# Altium PCB LedBtn.PcbDoc
Units mm, origin at the board's own origin, x right, y up, seen from the top; angles counter-clockwise.
Board outline 74 x 89.7 mm, 2 copper layers (Top Layer, Bottom Layer), stack 1.036 mm thick; 72 components, 49 nets, 224 pads, 24 vias.
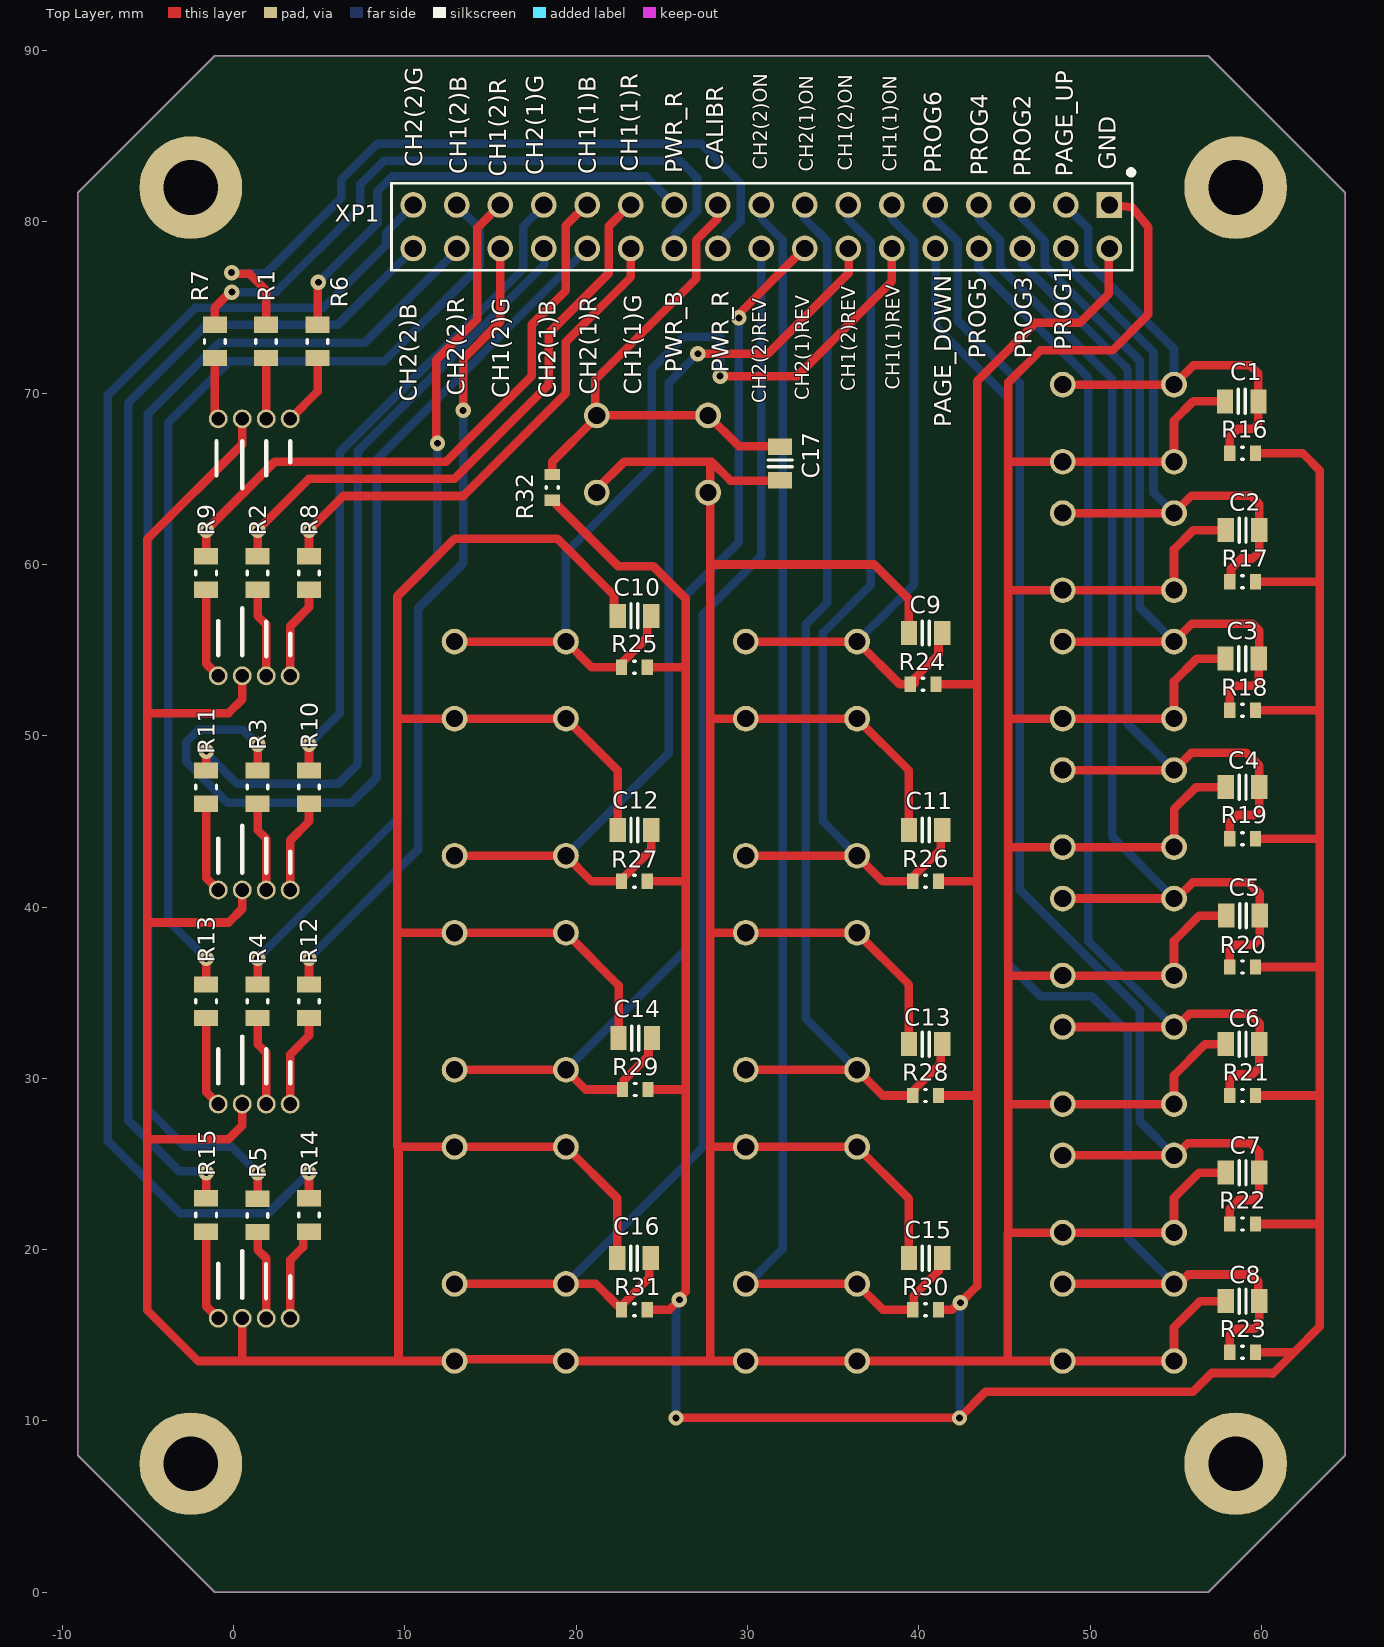
[diagram p0: Top Layer view]
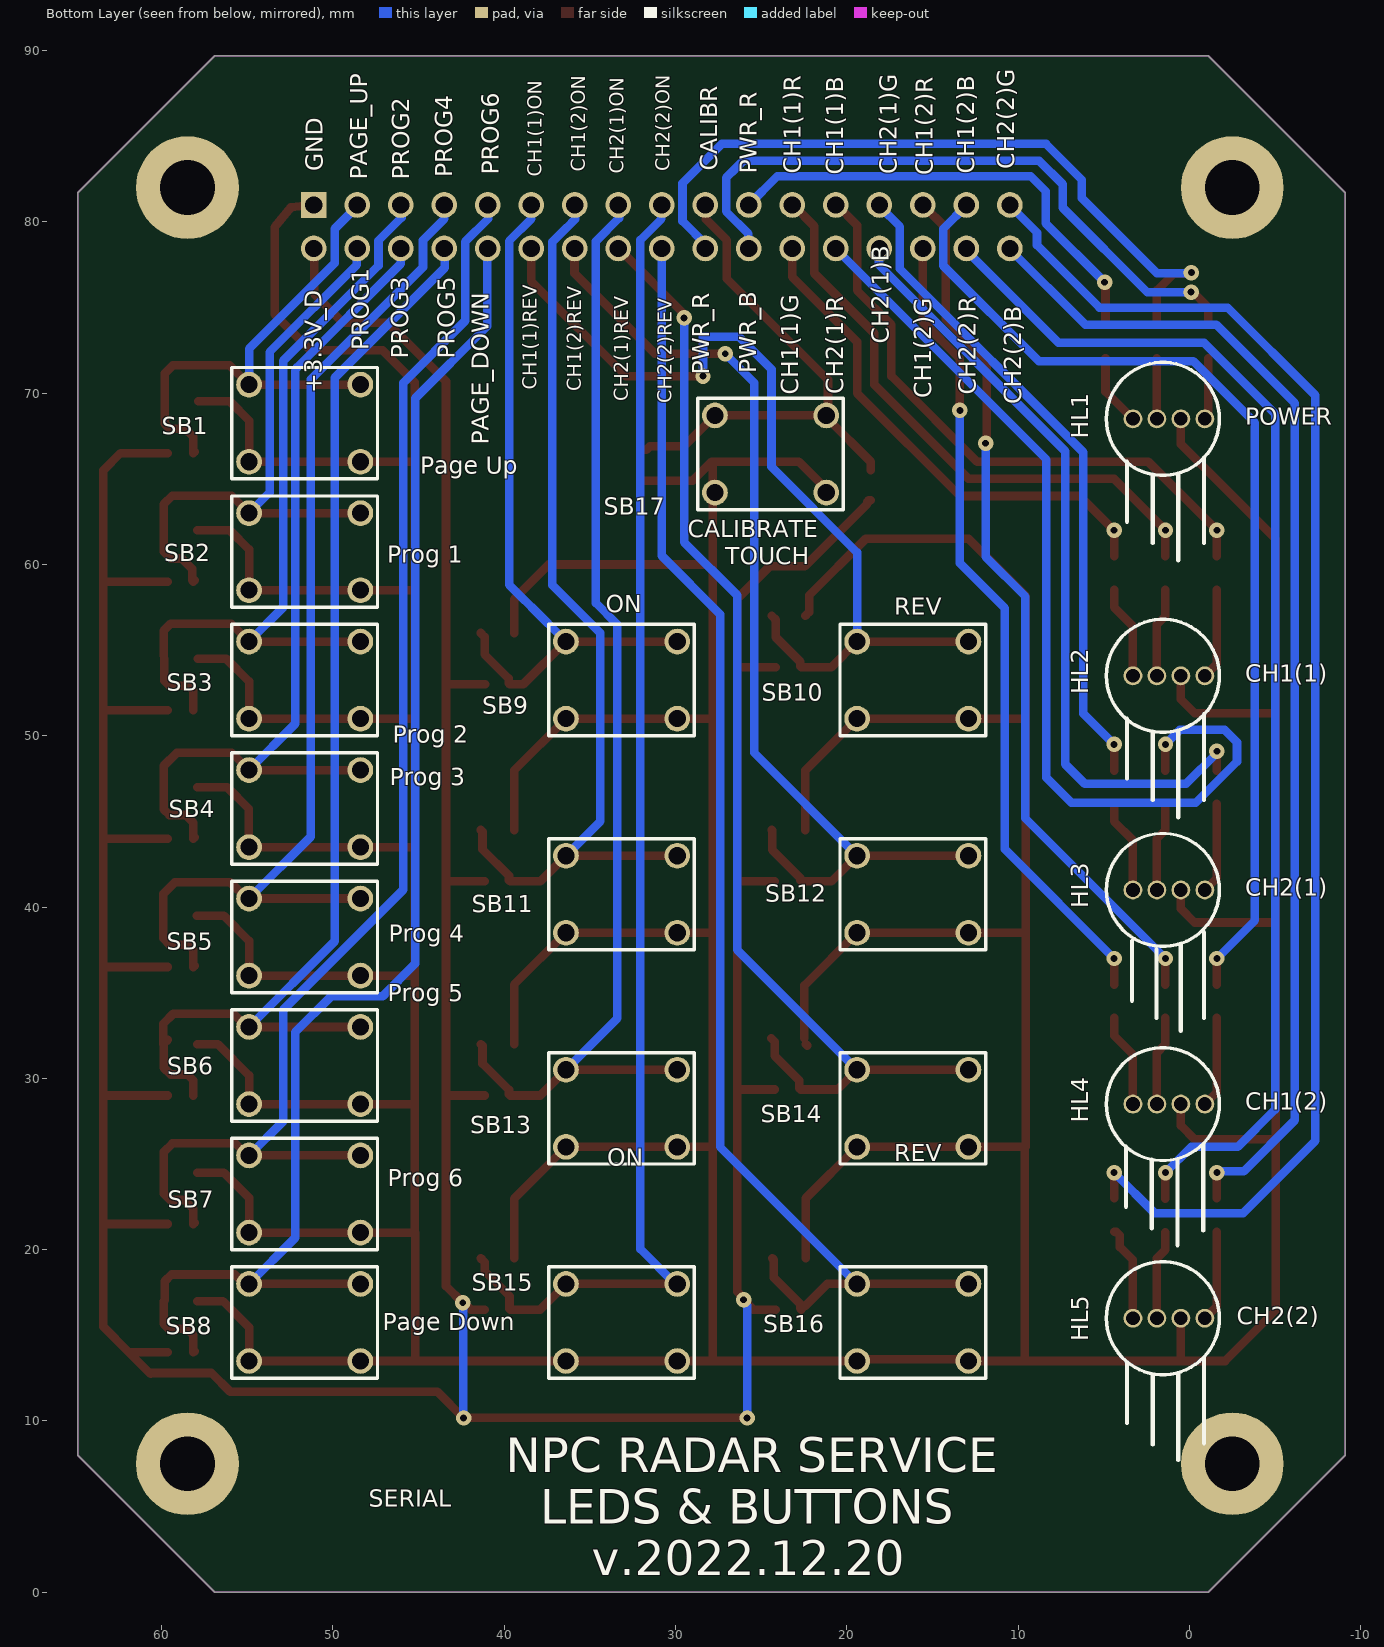
[diagram p1: Bottom Layer view, seen from below]

## Layer stack, top to bottom
Top Solder: solder mask 0.0102, Solder Resist, Dk 3.5
Top Layer: signal copper 0.018
Dielectric 1: dielectric 1, FR-4, Dk 4.8
Bottom Layer: signal copper 0.018
Bottom Solder: solder mask 0.0102, Solder Resist, Dk 3.5

## Board outline
-9.1,8 -9.1,81.7 -1.1,89.7 56.9,89.7 64.9,81.7 64.9,8 56.9,0 -1.1,0

## Design rules (kind name [scope] priority, off if disabled: settings)
Clearance [All] p1: gap=0.2 ignorepadtopadclearanceinfootprint=FALSE except(0: Arc-Hole Track-Hole SMDPad-Hole THPad-Hole Via-Hole Fill-Hole Poly-Hole Region-Hole Text-Hole)
PlaneConnect [All] p1: planeconnectstyle=Direct reliefexpansion=0.508 reliefentries=4 reliefconductorwidth=0.254 reliefairgap=0.254
PolygonConnect [All] p1: connectstyle=Direct reliefconductorwidth=0.254 reliefentries=4 polygonreliefangle="90 Angle" airgapwidth=0.254
RoutingVias [All] p1: holewidth=0.4 width=0.9 viastyle="Through Hole" minholewidth=0.4 minwidth=0.9 maxholewidth=2 maxwidth=4
SolderMaskExpansion [All] p1: expansion=0.05 istentingtop=FALSE
Width Width_1 [All] p1: maxlimit=3 minlimit=0.2 preferedwidth=0.5
29 further rules are at their usual default settings.

## Components (designator, comment, footprint, x,y, rotation, side; value= is the part's Value field where it differs from the comment)
C1 "Capacitor" Cap0805 58.85,69.525 r90 top value=0,1мкФ
C2 "Capacitor" Cap0805 58.9,62 r90 top value=0,1мкФ
C3 "Capacitor" Cap0805 58.875,54.5 r90 top value=0,1мкФ
C4 "Capacitor" Cap0805 58.9,47 r90 top value=0,1мкФ
C5 "Capacitor" Cap0805 58.925,39.5 r90 top value=0,1мкФ
C6 "Capacitor" Cap0805 58.9,32 r90 top value=0,1мкФ
C7 "Capacitor" Cap0805 58.9,24.5 r90 top value=0,1мкФ
C8 "Capacitor" Cap0805 58.9,17 r90 top value=0,1мкФ
C9 "Capacitor" Cap0805 40.4,56 r90 top value=0,1мкФ
C10 "Capacitor" Cap0805 23.4,57 r90 top value=0,1мкФ
C11 "Capacitor" Cap0805 40.4,44.5 r90 top value=0,1мкФ
C12 "Capacitor" Cap0805 23.4,44.5 r90 top value=0,1мкФ
C13 "Capacitor" Cap0805 40.4,32 r90 top value=0,1мкФ
C14 "Capacitor" Cap0805 23.45,32.35 r90 top value=0,1мкФ
C15 "Capacitor" Cap0805 40.4,19.5 r90 top value=0,1мкФ
C16 "Capacitor" Cap0805 23.375,19.5 r90 top value=0,1мкФ
C17 "Capacitor" Cap0805 31.9,65.9 r180 top value=0,1мкФ
HL1 "LED-RGB_C" BL-L515 3.3,68.5 r180 bottom
HL2 "LED-RGB_C" BL-L515 3.3,53.5 r180 bottom
HL3 "LED-RGB_C" BL-L515 3.3,41 r180 bottom
HL4 "LED-RGB_C" BL-L515 3.3,28.5 r180 bottom
HL5 "LED-RGB_C" BL-L515 3.3,16 r180 bottom
R1 "Resistor0125" Res0805 1.9,73.025 r180 top value=1к
R2 "Resistor0125" Res0805 1.4,59.5 r180 top value=1к
R3 "Resistor0125" Res0805 1.4,47 r180 top value=1к
R4 "Resistor0125" Res0805 1.4,34.5 r180 top value=1к
R5 "Resistor0125" Res0805 1.4,22 r180 top value=1к
R6 "Resistor0125" Res0805 4.9,73.025 r180 top value=1к
R7 "Resistor0125" Res0805 -1.1,73.025 r180 top value=1к
R8 "Resistor0125" Res0805 4.4,59.5 r180 top value=1к
R9 "Resistor0125" Res0805 -1.6,59.5 r180 top value=1к
R10 "Resistor0125" Res0805 4.4,47 r180 top value=1к
R11 "Resistor0125" Res0805 -1.6,47 r180 top value=1к
R12 "Resistor0125" Res0805 4.4,34.5 r180 top value=1к
R13 "Resistor0125" Res0805 -1.6,34.5 r180 top value=1к
R14 "Resistor0125" Res0805 4.4,22.025 r180 top value=1к
R15 "Resistor0125" Res0805 -1.6,22.025 r180 top value=1к
R16 "Resistor01" Res0603 58.9,66.5 r90 top value=10к
R17 "Resistor01" Res0603 58.9,59 r90 top value=10к
R18 "Resistor01" Res0603 58.9,51.5 r90 top value=10к
R19 "Resistor01" Res0603 58.9,44 r90 top value=10к
R20 "Resistor01" Res0603 58.9,36.5 r90 top value=10к
R21 "Resistor01" Res0603 58.9,29 r90 top value=10к
R22 "Resistor01" Res0603 58.9,21.5 r90 top value=10к
R23 "Resistor01" Res0603 58.9,14 r90 top value=10к
R24 "Resistor01" Res0603 40.25,53 r90 top value=10к
R25 "Resistor01" Res0603 23.4,54 r90 top value=10к
R26 "Resistor01" Res0603 40.4,41.5 r90 top value=10к
R27 "Resistor01" Res0603 23.4,41.5 r90 top value=10к
R28 "Resistor01" Res0603 40.4,29 r90 top value=10к
R29 "Resistor01" Res0603 23.45,29.35 r90 top value=10к
R30 "Resistor01" Res0603 40.4,16.5 r90 top value=10к
R31 "Resistor01" Res0603 23.4,16.5 r90 top value=10к
R32 "Resistor01" Res0603 18.6,64.5 r0 top value=10к
SB1 "Knopka" Switch_tact_11mm 54.9,66 r180 bottom
SB2 "Knopka" Switch_tact_11mm 54.9,58.5 r180 bottom
SB3 "Knopka" Switch_tact_11mm 54.9,51 r180 bottom
SB4 "Knopka" Switch_tact_11mm 54.9,43.5 r180 bottom
SB5 "Knopka" Switch_tact_11mm 54.9,36 r180 bottom
SB6 "Knopka" Switch_tact_11mm 54.9,28.5 r180 bottom
SB7 "Knopka" Switch_tact_11mm 54.9,21 r180 bottom
SB8 "Knopka" Switch_tact_11mm 54.9,13.5 r180 bottom
SB9 "Knopka" Switch_tact_11mm 36.4,51 r180 bottom
SB10 "Knopka" Switch_tact_11mm 19.4,51 r180 bottom
SB11 "Knopka" Switch_tact_11mm 36.4,38.5 r180 bottom
SB12 "Knopka" Switch_tact_11mm 19.4,38.5 r180 bottom
SB13 "Knopka" Switch_tact_11mm 36.4,26 r180 bottom
SB14 "Knopka" Switch_tact_11mm 19.4,26 r180 bottom
SB15 "Knopka" Switch_tact_11mm 36.4,13.5 r180 bottom
SB16 "Knopka" Switch_tact_11mm 19.4,13.5 r180 bottom
SB17 "Knopka" Switch_tact_11mm 27.7,64.2 r180 bottom
XP1 "ConnectorP34" PLD-34 30.805,79.72 r270 top value=34

## Footprints (in the part's own frame and the unit in brackets; to place one, negate y for a bottom-side part, rotate by r counter-clockwise, add the part's x,y. Pads: shape width x height; smd on the part's side, far side on the other; paste and mask are expansions set on the pad)
BL-L515 [mm]
  round 1.1 hole 0.8: 1(0,0) 2(1.4,0) 3(2.8,0) 4(4.2,0)
  silkscreen extent -1.55,-3.3 5.05,3.3, body extent -1.27,-2.95 4.63,2.95, height 9.1
Cap0805 [mm] "Chip Capacitor, 2-Leads, Body 2,00x1,25mm, IPC Medium Density"
  rect 1.4x0.95 smd: 1(0,0.975) 2(0,-0.975)
  silkscreen extent -0.7,-0.2 0.7,0.2, body extent -0.62,-1 0.63,1, height 0.58
PLD-34 [mm]
  rect 1.5x1.5 hole 1 mask+0: 1(-1.27,20.32)
  round 1.5 hole 1 mask+0: 2(1.27,20.32) 3(-1.27,17.78) 4(1.27,17.78) 5(-1.27,15.24) 6(1.27,15.24) 7(-1.27,12.7) 8(1.27,12.7) 9(-1.27,10.16) 10(1.27,10.16) 11(-1.27,7.62) 12(1.27,7.62) 13(-1.27,5.08) 14(1.27,5.08) 15(-1.27,2.54) 16(1.27,2.54) 17(-1.27,0) 18(1.27,0) 19(-1.27,-2.54) 20(1.27,-2.54) 21(-1.27,-5.08) 22(1.27,-5.08) 23(-1.27,-7.62) 24(1.27,-7.62) 25(-1.27,-10.16) 26(1.27,-10.16) 27(-1.27,-12.7) 28(1.27,-12.7) 29(-1.27,-15.24) 30(1.27,-15.24) 31(-1.27,-17.78) 32(1.27,-17.78) 33(-1.27,-20.32) 34(1.27,-20.32)
  silkscreen extent -3.32,-21.59 2.54,21.74, body extent -2.5,-21.59 2.5,21.59, height 8.5
Res0603 [mm] "Chip Resistor, 2-Leads, Body 1,60x0,80mm, IPC Medium Density"
  rect 0.9x0.65 smd: 1(0,0.75) 2(0,-0.75)
  silkscreen extent -0.35,-0.05 0.35,0.05, body extent -0.4,-0.8 0.4,0.8, height 0.5
Res0805 [mm] "Chip Resistor, 2-Leads, Body 2,00x1,25mm, IPC Medium Density"
  rect 1.4x0.95 smd: 1(0,0.975) 2(0,-0.975)
  silkscreen extent -0.6,-0.1 0.6,0.1, body extent -0.63,-1 0.63,1, height 0.43
Switch_tact_11mm [mm]
  round 1.5 hole 1: 1(0,4.5) 2(6.5,4.5) 3(0,0) 4(6.5,0)
  silkscreen extent -1,-1 7.5,5.5, body extent -0.65,-0.8 7.25,5.2, height 11.1

## Part data
C1 C2 C3 C4 C5 C6 C7 C8 C9 C10 C11 C12 C13 C14 C15 C16 C17: library part 2161, Manufacturer="ОАО «ВЗРД Монолит»", ManufacturerTU=ФЦТА.673516.016ТУ, Package="0805 (2012)", PartNumber="К10-84в-2012М-50 В-Н90-0,1 мкФ+80 %-20 %-N-A", SolderTemperature=175, TemperatureRange="от минус 60 до 85", VoltageLimit=50, Alternative="0805 0,1 мкФ, 50 В, ±10 %", CardKRR=67, ComponentLink1Description=К10-84, ComponentLink1URL=\\192.168.0.101\U_Base\PDF\C\K10-84.pdf, DataSheet=#\\192.168.0.101\U_Base\PDF\C\K10-84.pdf#, Group=Конденсаторы, HelpURL=\\192.168.0.101\U_Base\PDF\C\K10-84.pdf, Key=2161, MilitaryControl=ВП, Modify=13.03.2019, MountType=ПМ, Name=К10-84в, SolderName=K10-84v-2012M-50V-N90-0,1mkF, ViewControl="В, 10%", X_SORT_1=100, X_SORT_2=200, X_SORT_3=1
HL1 HL2 HL3 HL4 HL5: library part 90, "Светодиод RGB с общим анодом BL-L515RGBW-CA", Manufacturer="Betlux Electronics", Package=6mm, PartNumber="Светодиод BL-L515RGBW-CС", ComponentLink1Description=BL-L515, ComponentLink1URL="\\192.168.0.101\U_Base\PDF\V\BetLux Electronics.pdf", DataSheet="#\\192.168.0.101\U_Base\PDF\V\BetLux Electronics.pdf#", Group=Светодиоды, HelpURL="\\192.168.0.101\U_Base\PDF\V\BetLux Electronics.pdf", Key=90, MilitaryControl=ОТК, Modify=14.03.2019, MountType=РМ, Name=BL-L515, Notice="Betlux Electronics", SolderName=BL-L515, ViewControl="В, 10%", X_SORT_1=500, X_SORT_2=301, X_SORT_3=1
R1 R2 R3 R4 R5 R6 R7 R8 R9 R10 R11 R12 R13 R14 R15: library part 2957, Manufacturer="АО «НПО «Эркон»", ManufacturerTU=ОЖ0.467.164ТУ, Package="0805 (2012)", PartNumber="Р1-8В-0,125-1 кОм±5 %-Т-А", PowerLimit=0,125, SolderTemperature=255, TemperatureRange="от минус 65 до 155", VoltageLimit=150, Alternative="0805 1 кОм, 0,125 Вт, ±5 %", Alternative2="Р1-8В-0,125-1 кОм±5 %-Т-А ОЖ0.467.164ТУ", CardKRR=68, ComponentLink1Description=Р1-8В, ComponentLink1URL=\\192.168.0.101\U_Base\PDF\R\Р1-8В.pdf, DataSheet=#\\192.168.0.101\U_Base\PDF\R\Р1-8В.pdf#, Group=Резисторы, HelpURL=\\192.168.0.101\U_Base\PDF\R\Р1-8В.pdf, Key=2957, Mark=102, Mass=0,006, MilitaryControl=ВП, Modify=28.06.2019, MountType=ПМ, Name=Р1-8В, SolderName=R1-8B-0.125-1kOm, ViewControl="В, 10%", X_SORT_1=400, X_SORT_2=100, X_SORT_3=1
R16 R17 R18 R19 R20 R21 R22 R23 R24 R25 R26 R27 R28 R29 R30 R31 R32: library part 2943, Manufacturer="АО «НПО «Эркон»", ManufacturerTU=ОЖ0.467.164ТУ, Package="0603 (1608)", PartNumber="Р1-8В-0,1-10 кОм±5 %-Т-А", PowerLimit=0,1, SolderTemperature=255, TemperatureRange="от минус 65 до 155", VoltageLimit=100, Alternative="0603 10 кОм, 0,1 Вт, ±5 %", Alternative2="Р1-8В-0,1-10 кОм±5 %-Т-А ОЖ0.467.164ТУ", CardKRR=68, ComponentLink1Description=Р1-8В, ComponentLink1URL=\\192.168.0.101\U_Base\PDF\R\Р1-8В.pdf, DataSheet=#\\192.168.0.101\U_Base\PDF\R\Р1-8В.pdf#, Group=Резисторы, HelpURL=\\192.168.0.101\U_Base\PDF\R\Р1-8В.pdf, Key=2943, Mark=103, Mass=0,002, MilitaryControl=ВП, Modify=28.06.2019, MountType=ПМ, Name=Р1-8В, SolderName=R1-8B-0.1-10kOm, ViewControl="В, 10%", X_SORT_1=400, X_SORT_2=100, X_SORT_3=1
SB1 SB2 SB3 SB4 SB5 SB6 SB7 SB8 SB9 SB10 SB11 SB12 SB13 SB14 SB15 SB16 SB17: library part 60, Manufacturer="KLS Electronic", PartNumber="Кнопка тактовая прямая KLS7-TS6601-11-180", Alternative=IT-1102, ComponentLink1URL=\\192.168.0.101\U_Base\PDF\OTHER\KLS7-TS6601.pdf, DataSheet=#\\192.168.0.101\U_Base\PDF\OTHER\KLS7-TS6601.pdf#, Group="Кнопка тактовая", HelpURL=\\192.168.0.101\U_Base\PDF\OTHER\KLS7-TS6601.pdf, Key=60, MilitaryControl=ОТК, Modify=05.12.2022, MountType=РМ, Name=KLS7-TS6601-11-180, SolderName=KLS7-TS6601-11-180, ViewControl=В,100%
XP1: library part 57, CurrentLimit=1, Manufacturer="АО «Карачевский завод Электродеталь»", ManufacturerTU=РЮМК.430420.011ТУ, Package=PLD, PartNumber="Вилка СНП346-34ВП22-2-В", PowerLimit=250, TemperatureRange="от минус 60 до 85", Alternative=PLD-34, Alternative2="СНП346-34ВП22-2 РЮМК.430420.019ТУ", CardKRR=75, ComponentLink1Description=СНП346, ComponentLink1URL=\\192.168.0.101\U_Base\PDF\X\СНП346.pdf, Conn01Name=GND, Conn02Name=3.3V_D, Conn03Name=PAGE_UP, Conn04Name=PROG1, Conn05Name=PROG2, Conn06Name=PROG3, Conn07Name=PROG4, Conn08Name=PROG5, Conn09Name=PROG6, Conn10Name=PAGE_DOWN, Conn11Name=CH1(1)_ON, Conn12Name=CH1(1)_REV, Conn13Name=CH1(2)_ON, Conn14Name=CH1(2)_REV, Conn15Name=CH2(1)_ON, Conn16Name=CH2(1)_REV, Conn17Name=CH2(2)_ON, Conn18Name=CH2(2)_REV, Conn19Name=CALIBR_TP, Conn20Name=LED_PWR_R, Conn21Name=LED_PWR_G, Conn22Name=LED_PWR_B, Conn23Name=LED_CH1(1)_R, Conn24Name=LED_CH1(1)_G, Conn25Name=LED_CH1(1)_B, Conn26Name=LED_CH2(1)_R, Conn27Name=LED_CH2(1)_G, Conn28Name=LED_CH2(1)_B, Conn29Name=LED_CH1(2)_R, Conn30Name=LED_CH1(2)_G, Conn31Name=LED_CH1(2)_B, Conn32Name=LED_CH2(2)_R, Conn33Name=LED_CH2(2)_G, Conn34Name=LED_CH2(2)_B, Conn35Name=35, Conn36Name=36, Conn37Name=37, Conn38Name=38, Conn39Name=39, Conn40Name=40, DataSheet=#\\192.168.0.101\U_Base\PDF\X\СНП346.pdf#, Group=Соединители, HelpURL=\\192.168.0.101\U_Base\PDF\X\СНП346.pdf, Key=57, Mass=0,00204, MilitaryControl=ВП, Modify=19.09.2018, MountType=РМ, Name=СНП346-34ВП22-2-В, SolderName=SNP346-34VP22-2, ViewControl="В, 10%", VoltageLimit=250, X_SORT_1=700, X_SORT_2=600, X_SORT_3=1

## Free pads (board coordinates)
  round 6 hole 3.2 unplated: 0(-2.5,7.5) 0(-2.5,82) 0(58.5,7.5) 0(58.5,82)

## Via types
v1: diameter 0.9, hole 0.4, Top Layer to Bottom Layer, tented both sides, 24 vias

## Nets (pads, with @x,y where several pads share a name; then routed paths per layer and width w, separated by ;. In a path a pad name is that pad's centre, name@x,y a point inside that pad or via, vN(x,y) a via of type N, cw(c..) or ccw(c..) an arc to the next point about the centre after c; other vN are vias at no path point)
+3.3V_D: R16.2 R17.2 R18.2 R19.2 R20.2 R21.2 R22.2 R23.2 R24.2 R25.2 R26.2 R27.2 R28.2 R29.2 R30.2 R31.2 R32.2 XP1.2 | length 267.9
  Top Layer w0.5: R32.2 18.725,63.75 18.8,63.675 18.8,63.55 22.45,59.9 24.5,59.9 26.4,58 26.4,54 ; R31.2 25.45,16.5 v1(26.025,17.075) 26.025,17.183 26.4,17.558 26.4,29.35 ; R25.2 26.4,54 ; R29.2 26.4,29.35 ; R27.2@24.225,41.5 26.4,41.5 ; v1(25.825,10.175) v1(42.375,10.175) 43.9,11.7 56,11.7 57.1,12.8 60.6,12.8 60.65,12.75 61.9,14 ; R24.2@41.1,53 43.4,53 ; R30.2 41.947,16.5 42.347,16.9 v1(42.425,16.9) 43.4,17.875 43.4,22.5 43.4,29 ; R28.2 43.4,29 ; R26.2 43.4,41.5 ; XP1.2@50.875,78.575 XP1.2@51.1,78.35 ; XP1.2@51.1,78.5 XP1.2@51.1,78.35 ; XP1.2@51.13,78.32 XP1.2@51.1,78.35 ; R23.2 61.9,14 ; R22.2 63.4,21.5 ; R21.2 63.4,29 ; R20.2 63.4,36.5 ; R19.2 63.4,44 ; R18.2 63.4,51.5 ; R17.2 63.4,59 ; R16.2 62.4,66.5 63.4,65.5 63.4,59 ; 26.4,29.35 26.4,41.5 ; 26.4,41.5 26.4,54 ; 43.4,29 43.4,41.5 ; 43.4,41.5 43.4,53 ; 43.4,53 43.4,70.7 46.8,74.1 49.4,74.1 51.1,75.8 XP1.2@51.1,78.35 ; 61.9,14 63.4,15.5 63.4,21.5 ; 63.4,21.5 63.4,29 ; 63.4,29 63.4,36.5 ; 63.4,36.5 63.4,44 ; 63.4,44 63.4,51.5 ; 63.4,51.5 63.4,59
  Bottom Layer w0.5: v1(25.825,10.175) 25.825,16.767 26.025,16.967 v1(26.025,17.075) ; v1(42.375,10.175) 42.4,10.2 42.4,16.825 42.375,16.85 v1(42.425,16.9)
BTN_CALIBR_TP: C17.2 R32.1 SB17.1 SB17.2 XP1.19 | length 31.4
  Top Layer w0.5: R32.1@18.6,65.5 18.6,66 SB17.2@21.1,68.5 ; XP1.19@28.238,81.038 28.238,80.163 27,78.925 27,76.675 21.1,70.775 SB17.2@21.1,68.5 ; C17.2@31.9,66.7 31.7,66.7 31.5,66.9 29.5,66.9 SB17.1 21.4,68.7 21.4,68.8 SB17.2@21.1,68.5
BTN_CH1(1)_ON: C9.2 R24.1 SB9.1 SB9.2 XP1.11 | length 42.5
  Top Layer w0.5: SB9.2 SB9.1 38.893,53.007 39.668,53.007 39.675,53 39.75,53.075 39.75,53.35 41.15,54.75 41.15,55.775 C9.2
  Bottom Layer w0.5: SB9.1 38.43,57.53 ; 37.8,56.9 39.72,58.82 39.72,78.88 38.425,80.175 XP1.11@38.425,80.706
BTN_CH1(1)_REV: C10.2 R25.1 SB10.1 SB10.2 XP1.12 | length 53.3
  Top Layer w0.5: SB10.2 SB10.1 20.9,54 R25.1 22.725,54.075 22.725,54.325 24.15,55.75 24.15,56.775 C10.2 ; v1(28.4,71) 32.9,71 38.425,76.525 XP1.12@38.425,78.4
  Bottom Layer w0.5: SB10.1 19.4,60.703 24.4,65.703 24.4,71.4 26.3,73.3 28.4,73.3 v1(28.4,71)
BTN_CH1(2)_ON: C11.2 R26.1 SB11.1 SB11.2 XP1.13 | length 54.6
  Top Layer w0.5: SB11.2 SB11.1 37.9,41.5 R26.1 39.725,41.575 39.725,41.825 41.27,43.37 41.27,44.395 C11.2
  Bottom Layer w0.5: XP1.13@35.86,80.965 35.86,80.165 36.375,79.65 36.382,79.65 37.085,78.947 37.085,78.94 37.2,78.825 37.2,58.8 34.4,56 34.4,45 SB11.1
BTN_CH1(2)_REV: C12.2 R27.1 SB12.1 SB12.2 XP1.14 | length 58.7
  Top Layer w0.5: SB12.2 SB12.1 20.9,41.5 R27.1 22.725,41.575 22.725,41.7 24.368,43.343 24.368,44.493 C12.2 ; v1(27.1,72.3) 31.2,72.3 35.9,77 XP1.14@35.9,78.4
  Bottom Layer w0.5: SB12.1 25.4,49 25.4,70.6 27,72.2 v1@27.1,72.2
BTN_CH2(1)_ON: C13.2 R28.1 SB13.1 SB13.2 XP1.15 | length 67.3
  Top Layer w0.5: SB13.2 SB13.1 37.9,29 R28.1 39.725,29.075 39.725,29.325 41.27,30.87 41.27,31.895 C13.2
  Bottom Layer w0.5: XP1.15@33.3,80.975 33.3,80.225 34.65,78.875 34.65,57.75 33.4,56.5 33.4,33.5 SB13.1@36.712,30.188
BTN_CH2(1)_REV: C14.2 R29.1 SB14.1 SB14.2 XP1.16 | length 67.7
  Top Layer w0.5: SB14.2 SB14.1 20.55,29.35 R29.1 22.775,29.425 22.775,29.875 24.22,31.32 24.22,32.145 C14.2 ; v1(29.5,74.4) 29.5,74.625 33.1,78.225 XP1.16@33.375,78.225
  Bottom Layer w0.5: SB14.1 26.4,37.5 26.4,58.2 29.5,61.3 v1(29.5,74.4)
BTN_CH2(2)_ON: C15.2 R30.1 SB15.1 SB15.2 XP1.17 | length 78.4
  Top Layer w0.5: SB15.2 SB15.1 37.9,16.5 R30.1 39.693,16.543 39.693,17.293 41.15,18.75 41.15,19.275 C15.2
  Bottom Layer w0.5: SB15.2 30.017,18 32.05,20.033 32.05,78.95 30.825,80.175 XP1.17@30.825,80.8
BTN_CH2(2)_REV: C16.2 R31.1 SB16.1 SB16.2 XP1.18 | length 79.2
  Top Layer w0.5: SB16.2 SB16.1 21.15,18 22.45,16.7 22.575,16.7 22.65,16.625 R31.1 22.725,16.575 22.725,16.825 24.257,18.357 24.257,19.407 C16.2
  Bottom Layer w0.5: SB16.1 27.4,26 27.4,57.1 30.81,60.51 XP1.18@30.81,78.375
BTN_PAGE_DOWN: C8.2 R23.1 SB8.1 SB8.2 XP1.10 | length 85.4
  Top Layer w0.5: SB8.2 SB8.1 55.171,18 55.594,18.423 55.598,18.423 55.725,18.55 59.425,18.55 59.818,18.157 59.818,17.057 C8.2 59.875,15.668 59.582,15.375 58.525,15.375 58.15,15 R23.1 R23.1@58.075,14.075
  Bottom Layer w0.5: XP1.10@41,78.425 41,73.9 45.2,69.7 45.2,36.7 47.1,34.8 50.1,34.8 52.2,32.7 52.2,20.7 SB8.1
BTN_PAGE_UP: C1.2 R16.1 SB1.1 SB1.2 XP1.3 | length 31.3
  Top Layer w0.5: SB1.2 SB1.1 56.025,71.625 59.35,71.625 59.825,71.15 C1.2 59.825,68.218 59.532,67.925 58.625,67.925 58.15,67.45 R16.1 R16.1@58.075,66.575
  Bottom Layer w0.5: XP1.3@48.5,81 49.9,79.6 49.9,77.6 54.9,72.6 54.9,70.8 SB1.1@55.2,70.5
BTN_PROG1: C2.2 R17.1 SB2.1 SB2.2 XP1.4 | length 35.8
  Top Layer w0.5: SB2.2 SB2.1 55.925,64.025 59.375,64.025 59.875,63.525 C2.2 59.875,60.75 59.475,60.35 58.825,60.35 58.225,59.75 58.225,59.075 R17.1 R17.1@58.075,59.075
  Bottom Layer w0.5: XP1.4@48.6,78.4 48.6,77.5 53.7,72.4 53.7,64.2 SB2.1
BTN_PROG2: C3.2 R18.1 SB3.1 SB3.2 XP1.5 | length 46.9
  Top Layer w0.5: SB3.2 SB3.1 55.95,56.55 59.475,56.55 59.888,56.137 C3.2@59.888,54.688 ; R18.1 58.15,52.632 58.443,52.925 59.55,52.925 59.85,53.225 C3.2
  Bottom Layer w0.5: XP1.5@46,80.95 46,80.25 47.34,78.91 ; 47.344,78.9 47.344,77.456 52.9,71.9 ; 52.9,71.8 52.9,57.5 SB3.1
BTN_PROG3: C4.2 R19.1 SB4.1 SB4.2 XP1.6 | length 51.8
  Top Layer w0.5: SB4.2 SB4.1 55.9,49 59.125,49 59.875,48.25 C4.2 59.875,45.7 59.55,45.375 58.6,45.375 58.15,44.925 R19.1 R19.1@58.075,44.075
  Bottom Layer w0.5: XP1.6 46.045,77.555 52.1,71.5 ; XP1.6@46.05,78.41 XP1.6@46.14,78.5 ; 52.2,71.3 52.2,50.7 SB4.1
BTN_PROG4: C5.2 R20.1 SB5.1 SB5.2 XP1.7 | length 63
  Top Layer w0.5: SB5.2 SB5.1 55.05,40.5 56,41.45 59.225,41.45 59.9,40.775 C5.2 59.9,38.175 59.525,37.8 58.45,37.8 58.15,37.5 R20.1 R20.1@58.075,36.575
  Bottom Layer w0.5: XP1.7@43.5,80.9 43.5,80.176 44.744,78.932 44.744,77.356 51.3,70.8 51.3,44.1 SB5.1
BTN_PROG5: C6.2 R21.1 SB6.1 SB6.2 XP1.8 | length 68.4
  Top Layer w0.5: SB6.2 SB6.1 55.025,33 55.8,33.775 59.325,33.775 59.9,33.2 59.9,32 C6.2@59.65,32.25 ; R21.1 58.15,29.875 58.5,30.225 59.475,30.225 59.875,30.625 C6.2
  Bottom Layer w0.5: XP1.8@43.475,78.45 43.475,77.325 49.9,70.9 49.9,38 SB6.1 ; XP1.8@43.525,78.202 43.525,78.375 XP1.8@43.6,78.45
BTN_PROG6: C7.2 R22.1 SB7.1 SB7.2 XP1.9 | length 78.8
  Top Layer w0.5: SB7.2 SB7.1 54.993,25.5 55.693,26.2 59.375,26.2 59.875,25.7 C7.2 59.875,23.275 59.5,22.9 58.675,22.9 58.15,22.375 R22.1 R22.1@58.075,21.575
  Bottom Layer w0.5: XP1.9@40.925,81.05 40.925,80.2 42.275,78.85 42.275,74.225 45.9,70.6 45.9,41.01 52.9,34.01 52.9,27.5 SB7.1
GND: C1.1 C2.1 C3.1 C4.1 C5.1 C6.1 C7.1 C8.1 C9.1 C10.1 C11.1 C12.1 C13.1 C14.1 C15.1 C16.1 C17.1 HL1.3 HL2.3 HL3.3 HL4.3 HL5.3 SB1.3 SB1.4 SB2.3 SB2.4 SB3.3 SB3.4 SB4.3 SB4.4 SB5.3 SB5.4 SB6.3 SB6.4 SB7.3 SB7.4 SB8.3 SB8.4 SB9.3 SB9.4 SB10.3 SB10.4 SB11.3 SB11.4 SB12.3 SB12.4 SB13.3 SB13.4 SB14.3 SB14.4 SB15.3 SB15.4 SB16.3 SB16.4 SB17.3 SB17.4 XP1.1 | length 568.5
  Top Layer w0.5: HL5.3 0.5,13.5 ; HL4.3 0.5,27.25 -0.3,26.45 -5.05,26.45 ; HL3.3 0.5,39.9 -0.3,39.1 -5.05,39.1 ; HL2.3 0.5,52.125 -0.3,51.325 -5.05,51.325 ; HL1.3 0.5,67.025 -5.05,61.475 -5.05,51.325 ; SB14.3@19.113,26 9.625,26 ; SB10.3@19.211,51 9.55,51 ; SB12.3@19.367,38.5 9.55,38.5 ; SB14.3 22.4,23 C16.1 ; SB12.3 22.475,35.425 C14.1 ; SB10.3 22.425,47.975 C12.1 ; SB17.4@21.2,64.4 22.8,66 27.9,66 ; C14.1@22.318,31.918 C14.1@22.4,32 ; C10.1 22.207,57.218 22.207,58.193 18.9,61.5 12.9,61.5 9.55,58.15 9.55,51 ; 27.825,13.75 27.825,26 ; SB11.4@29.82,38.5 27.825,38.5 ; SB11.4 SB11.3 39.425,35.475 C13.1 ; C17.1@31.9,64.9 29,64.9 27.9,66 ; SB15.3 SB15.4 SB16.3 19.3,13.6 13,13.6 SB16.4 9.625,13.5 ; SB15.3@36.5,13.5 45.2,13.5 ; C15.1 39.425,22.975 SB13.3 27.825,26 ; C11.1 39.425,47.975 SB9.3 SB9.4 27.825,51 ; C9.1 39.425,57.975 37.4,60 27.825,60 ; XP1.1 52.455,80.856 53.4,79.7 ; 53.4,79.6 53.4,74.6 51.3,72.5 47.1,72.5 45.225,70.625 45.225,65.925 ; C1.1 56.025,69.525 54.9,68.4 SB1.3 SB1.4 45.3,66 45.225,65.925 ; C3.1 56.225,54.5 54.9,53.175 SB3.3 SB3.4 45.225,51 ; C8.1 56.425,17 54.9,15.475 SB8.3 SB8.4 45.2,13.5 ; C7.1 56.375,24.5 54.9,23.025 SB7.3 SB7.4 45.225,21 ; C6.1 56.725,32 54.9,30.175 SB6.3 SB6.4 45.25,28.5 45.225,28.525 ; C4.1 56.175,47 54.925,45.75 54.925,43.525 SB4.3 SB4.4 45.325,43.5 45.225,43.4 ; C2.1 56.025,62 54.9,60.875 SB2.3 SB2.4 45.25,58.5 45.225,58.475 ; C5.1 56.375,39.5 54.9,38.025 SB5.3 SB5.4 45.25,36 45.225,36.025 ; -5.05,26.45 -5.05,16.475 -2.075,13.5 0.5,13.5 ; -5.05,26.45 -5.05,39.1 ; -5.05,39.1 -5.05,51.325 ; 0.5,13.5 9.625,13.5 ; 9.55,38.5 9.55,51 ; 9.55,38.5 9.55,26 9.625,26 ; 9.625,13.5 9.625,26 ; 27.825,26 27.825,38.5 ; 27.825,38.5 27.825,51 ; 27.825,51 27.825,60 ; 27.825,60 27.825,65.925 27.9,66 ; 45.2,13.5 45.2,20.975 45.225,21 ; 45.225,21 45.225,28.525 ; 45.225,28.525 45.225,36.025 ; 45.225,36.025 45.225,43.4 ; 45.225,43.4 45.225,51 ; 45.225,51 45.225,58.475 ; 45.225,58.475 45.225,65.925
LED_CH1(1)_O_B: R9.2 XP1.25 | length 35.6
  Top Layer w0.5: R9.2 v1(-1.6,62) 2.4,66 12.4,66 17.4,71 17.4,74 19.4,76 19.4,79.8 XP1.25@20.613,81.013
LED_CH1(1)_O_G: R8.2 XP1.24 | length 29.8
  Top Layer w0.5: R8.2 v1(4.4,62) 6.4,64 13.4,64 19.4,70 19.4,73 23.19,76.79 XP1.24@23.19,78.35
LED_CH1(1)_O_R: R2.2 XP1.23 | length 34.4
  Top Layer w0.5: R2.2 v1(1.4,62) 4.4,65 12.9,65 18.4,70.5 18.4,73.5 21.9,77 21.9,79.75 XP1.23@23.075,80.925
LED_CH1(2)_O_B: R13.2 XP1.31 | length 59.8
  Top Layer w0.5: R13.2 v1(-1.6,37)
  Bottom Layer w0.5: v1(-1.6,37) -3.825,39.225 -3.825,68.275 -0.225,71.875 8.8,71.875 14.37,77.445 14.37,77.948 14.365,77.953 14.365,79.61 XP1.31@13,80.975
LED_CH1(2)_O_G: R12.2 XP1.30 | length 47.5
  Top Layer w0.5: R12.2 v1(4.4,37) ; v1(13.4,69) 13.4,72 15.57,74.17 XP1.30@15.57,78.375
  Bottom Layer w0.5: v1(4.4,37) 10.775,43.375 10.775,57.45 13.4,60.075 v1(13.4,69)
LED_CH1(2)_O_R: R4.2 XP1.29 | length 51.5
  Top Layer w0.5: R4.2 v1(1.4,37) ; v1(11.9,67.075) 11.83,67.145 11.83,71.93 14.23,74.33 14.23,79.655 15.49,80.915 XP1.29@15.49,81.065
  Bottom Layer w0.5: v1(1.4,37) 9.575,45.175 9.575,58.125 11.9,60.45 v1(11.9,67.075)
LED_CH2(1)_O_B: R11.2 XP1.28 | length 45.9
  Top Layer w0.5: R11.2 v1(-1.6,49.1)
  Bottom Layer w0.5: v1(-1.6,49.1) -1.6,49 0.2,47.2 6.11,47.2 7.25,48.34 7.25,66.613 18.125,77.488 XP1.28@18.125,78.4
LED_CH2(1)_O_G: R10.2 XP1.27 | length 38.7
  Top Layer w0.5: R10.2 v1(4.4,49.5)
  Bottom Layer w0.5: v1(4.4,49.5) 6.2,51.3 6.2,66.553 16.9,77.253 16.9,79.725 18.048,80.873 XP1.27@18.222,80.873
LED_CH2(1)_O_R: R3.2 XP1.26 | length 56.1
  Top Layer w0.5: R3.2 v1(1.4,49.5)
  Bottom Layer w0.5: v1(1.4,49.5) 0.55,50.35 -2.05,50.35 -2.775,49.625 -2.775,48.5 -0.375,46.1 6.9,46.1 8.35,47.55 8.35,66.125 XP1.26@20.637,78.413
LED_CH2(2)_O_B: R15.2 XP1.34 | length 69.6
  Top Layer w0.5: R15.2 v1(-1.6,24.5)
  Bottom Layer w0.5: v1(-1.6,24.5) -1.677,24.577 -3.177,24.577 -6.15,27.55 -6.15,69.425 -1.575,74 6.075,74 XP1.34@10.5,78.425
LED_CH2(2)_O_G: R14.2 XP1.33 | length 82.4
  Top Layer w0.5: R14.2 v1(4.4,24.5)
  Bottom Layer w0.5: v1(4.4,24.5) 2.025,22.125 -3.125,22.125 -7.35,26.35 -7.35,69.875 -2.225,75 5.25,75 8.9,78.65 8.9,79.375 10.475,80.95 XP1.33@10.525,80.95
LED_CH2(2)_O_R: R5.2 XP1.32 | length 72.5
  Top Layer w0.5: R5.2 v1(1.4,24.5)
  Bottom Layer w0.5: v1(1.4,24.5) -0.1,26 -2.825,26 -5,28.175 -5,68.8 -0.85,72.95 7.65,72.95 12.839,78.139 XP1.32@12.839,78.889
LED_PWR_O_B: R7.2 XP1.22 | length 38.7
  Top Layer w0.5: R7.2 -1.1,75 -0.2,75.9 v1(-0.1,75.9)
  Bottom Layer w0.5: v1(-0.1,75.9) 2.475,75.9 7.4,80.825 7.4,82.2 8.775,83.575 26.05,83.575 26.432,83.193 27.05,82.575 27.05,80.613 25.75,79.313 25.75,78.4 XP1.22@25.775,78.375
LED_PWR_O_G: R6.2 XP1.21 | length 27.6
  Top Layer w0.5: R6.2 4.9,76.425 v1(4.95,76.475)
  Bottom Layer w0.5: v1(4.95,76.475) 8.4,79.925 8.4,81.8 9.275,82.675 24.05,82.675 XP1.21@25.725,81
LED_PWR_O_R: R1.2 XP1.20 | length 43.1
  Top Layer w0.5: v1(-0.116,77.043) -0.039,76.966 0.934,76.966 1.9,76 R1.2
  Bottom Layer w0.5: v1(-0.116,77.043) -0.073,77 1.9,77 6.275,81.375 6.275,82.45 8.375,84.55 27.3,84.55 29.594,82.256 29.594,80.044 XP1.20@28.188,78.638
NetHL1_1: HL1.1 R6.1 | length 4.2
  Top Layer w0.5: HL1.1 4.9,70.1 R6.1
NetHL1_2: HL1.2 R1.1 | length 3.5
  Top Layer w0.5: HL1.2 R1.1
NetHL1_4: HL1.4 R7.1 | length 3.6
  Top Layer w0.5: R7.1 -1.1,68.862 -0.9,68.662 HL1.4
NetHL2_1: HL2.1 R8.1 | length 5.5
  Top Layer w0.5: HL2.1 3.3,56.4 4.4,57.5 R8.1
NetHL2_2: HL2.2 R2.1 | length 5.2
  Top Layer w0.5: R2.1 1.4,57 1.9,56.5 HL2.2
NetHL2_4: HL2.4 R9.1 | length 5.3
  Top Layer w0.5: R9.1 -1.6,54.2 HL2.4
NetHL3_1: HL3.1 R10.1 | length 5.5
  Top Layer w0.5: HL3.1 3.3,43.9 4.4,45 R10.1
NetHL3_2: HL3.2 R3.1 | length 5.2
  Top Layer w0.5: R3.1 1.4,44.5 1.9,44 HL3.2
NetHL3_4: HL3.4 R11.1 | length 5.3
  Top Layer w0.5: R11.1 -1.6,41.7 HL3.4
NetHL4_1: HL4.1 R12.1 | length 5.5
  Top Layer w0.5: HL4.1 3.3,31.4 4.4,32.5 R12.1
NetHL4_2: HL4.2 R4.1 | length 5.2
  Top Layer w0.5: R4.1 1.4,32 1.9,31.5 HL4.2
NetHL4_4: HL4.4 R13.1 | length 5.3
  Top Layer w0.5: R13.1 -1.6,29.2 HL4.4
NetHL5_1: HL5.1 R14.1 | length 5.6
  Top Layer w0.5: HL5.1 3.3,19.4 4.057,20.157 4.057,20.825 4.282,21.05 R14.1
NetHL5_2: HL5.2 R5.1 | length 5.2
  Top Layer w0.5: R5.1 1.4,20 1.9,19.5 HL5.2
NetHL5_4: HL5.4 R15.1 | length 5.3
  Top Layer w0.5: R15.1 -1.6,16.7 HL5.4

## Keep-outs
Keep-Out Layer:
  the board outline again, w0.1

## Silkscreen, mask and mechanical layers (free items; w line width, h text height)
Top Overlay:
  lines w0.25: -1,65.2 -1,67.2 ; -0.9,17.175 -0.9,19.175 ; -0.9,29.7 -0.9,31.7 ; -0.9,42 -0.9,44 ; -0.9,54.7 -0.9,56.7 ; 0.5,17.175 0.5,19.925 ; 0.5,29.7 0.5,32.45 ; 0.5,42 0.5,44.75 ; 0.5,54.7 0.5,57.45 ; 0.5,64.45 0.5,67.2 ; 1.885,17.163 1.885,19.163 ; 1.9,29.7 1.9,31.7 ; 1.9,42 1.9,44 ; 1.9,54.65 1.9,56.65 ; 1.9,65.2 1.9,67.2 ; 3.3,29.7 3.3,30.95 ; 3.3,42 3.3,43.25 ; 3.3,54.7 3.3,55.95 ; 3.3,65.95 3.3,67.2 ; 3.302,17.2 3.302,18.45
  text "CH2(2)G" at 11.025,83.2 h1 r90
  text "CH2(2)ON" at 31.15,83.05 h0.8 r90
  text "GND" at 51.5,83.05 h1 r90
  text "CALIBR" at 28.575,82.975 h1 r90
  text "CH1(2)ON" at 36.125,82.975 h0.8 r90
  text "CH1(1)R" at 23.6,82.925 h1 r90
  text "CH2(1)ON" at 33.825,82.925 h0.8 r90
  text "CH1(1)ON" at 38.7,82.925 h0.8 r90
  text "PWR_R" at 26.2,82.85 h1 r90
  text "PROG6" at 41.3,82.85 h1 r90
  text "CH1(2)B" at 13.6,82.775 h1 r90
  text "CH1(1)B" at 21.15,82.775 h1 r90
  text "CH2(1)G" at 18.075,82.725 h1 r90
  text "PROG4" at 44.025,82.7 h1 r90
  text "CH1(2)R" at 15.925,82.625 h1 r90
  text "PROG2" at 46.55,82.625 h1 r90
  text "PAGE_UP" at 48.975,82.625 h1 r90
  text "PROG1" at 48.9,72.5 h1 r90
  text "PROG5" at 43.9,72 h1 r90
  text "PROG3" at 46.6,72 h1 r90
  text "PWR_B" at 26.2,71.2 h1 r90
  text "PWR_R" at 28.9,71.2 h1 r90
  text "CH1(1)REV" at 38.9,70.2 h0.8 r90
  text "CH1(2)REV" at 36.3,70.1 h0.8 r90
  text "CH2(1)R" at 21.2,69.9 h1 r90
  text "CH1(1)G" at 23.8,69.9 h1 r90
  text "CH2(2)R" at 13.45,69.85 h1 r90
  text "CH1(2)G" at 16.1,69.7 h1 r90
  text "CH2(1)B" at 18.8,69.7 h1 r90
  text "CH2(1)REV" at 33.6,69.6 h0.8 r90
  text "CH2(2)B" at 10.7,69.5 h1 r90
  text "CH2(2)REV" at 31.1,69.4 h0.8 r90
  text "PAGE_DOWN" at 41.9,68 h1 r90
Bottom Overlay:
  lines w0.25: -0.85,8.7 -0.85,13.7 ; -0.85,33.525 -0.85,38.525 ; -0.85,46.25 -0.85,51.25 ; -0.85,61.25 -0.85,66.25 ; -0.8,21.125 -0.8,26.125 ; 0.5,32.775 0.5,37.775 ; 0.65,7.725 0.65,12.725 ; 0.65,45.25 0.65,50.25 ; 0.65,60.25 0.65,65.25 ; 0.7,20.25 0.7,25.25 ; 1.925,33.525 1.925,37.525 ; 2.15,8.625 2.15,12.625 ; 2.15,46.25 2.15,50.25 ; 2.15,61.25 2.15,65.25 ; 2.2,21.25 2.2,25.25 ; 3.35,34.525 3.35,38.025 ; 3.65,9.875 3.65,13.375 ; 3.65,47.5 3.65,51 ; 3.65,62.5 3.65,66 ; 3.7,22.5 3.7,26
  text "CH2(2)G" at 10.225,83.075 h1 r270
  text "CALIBR" at 27.575,83 h1 r270
  text "CH2(2)ON" at 30.35,82.95 h0.8 r270
  text "GND" at 50.6,82.95 h1 r270
  text "CH1(2)ON" at 35.275,82.925 h0.8 r270
  text "PWR_R" at 25.275,82.825 h1 r270
  text "CH1(2)B" at 12.55,82.8 h1 r270
  text "CH1(1)R" at 22.7,82.8 h1 r270
  text "CH2(1)ON" at 33.025,82.8 h0.8 r270
  text "CH2(1)G" at 17.1,82.775 h1 r270
  text "CH1(1)B" at 20.2,82.75 h1 r270
  text "PROG6" at 40.325,82.75 h1 r270
  text "CH1(2)R" at 14.975,82.725 h1 r270
  text "CH1(1)ON" at 37.825,82.625 h0.8 r270
  text "PROG4" at 43.05,82.6 h1 r270
  text "PROG2" at 45.55,82.45 h1 r270
  text "PAGE_UP" at 48,82.45 h1 r270
  text "CH2(1)B" at 17.55,72.9 h1 r270
  text "PROG1" at 47.9,72.5 h1 r270
  text "PROG5" at 42.9,72 h1 r270
  text "PROG3" at 45.6,72 h1 r270
  text "PWR_B" at 25.3,71.15 h1 r270
  text "PWR_R" at 28.025,71.075 h1 r270
  text "CH1(1)REV" at 38.1,70.2 h0.8 r270
  text "CH1(2)REV" at 35.5,70.1 h0.8 r270
  text "+3.3V_D" at 50.655,70 h1 r270
  text "CH2(1)R" at 20.225,69.95 h1 r270
  text "CH2(2)R" at 12.475,69.9 h1 r270
  text "CH1(1)G" at 22.825,69.9 h1 r270
  text "CH1(2)G" at 15.075,69.7 h1 r270
  text "CH2(1)REV" at 32.75,69.525 h0.8 r270
  text "CH2(2)REV" at 30.225,69.425 h0.8 r270
  text "CH2(2)B" at 9.825,69.35 h1 r270
  text "POWER" at -3.254,68.154 h1
  text "PAGE_DOWN" at 40.9,67 h1 r270
  text "Page Up" at 44.9,65.3 h1
  text "CALIBRATE" at 29.3,61.6 h1
  text "Prog 1" at 46.846,60.087 h1
  text "TOUCH" at 27.1,60 h1
  text "ON" at 34.075,57.225 h1
  text "REV" at 17.225,57.075 h1
  text "CH1(1)" at -3.254,53.154 h1
  text "Prog 2" at 46.5,49.6 h1
  text "Prog 3" at 46.7,47.1 h1
  text "CH2(1)" at -3.254,40.654 h1
  text "Prog 4" at 46.746,37.987 h1
  text "Prog 5" at 46.8,34.5 h1
  text "CH1(2)" at -3.254,28.154 h1
  text "REV" at 17.246,25.154 h1
  text "ON" at 33.996,24.904 h1
  text "Prog 6" at 46.8,23.7 h1
  text "CH2(2)" at -2.754,15.654 h1
  text "Page Down" at 47.1,15.3 h1
  text "NPC RADAR SERVICE" at 39.9,7 h2
  text "SERIAL" at 47.9,5 h1
  text "LEDS & BUTTONS" at 37.9,4 h2
  text "v.2022.12.20" at 34.9,1 h2
Mechanical 2:
  text "o" at 33.454,31.754 h1
  text "o" at -69.146,29.654 h1
  text "o" at -69.146,23.654 h1
  text "o" at -2.146,22.054 h1
  text "+" at 21.754,19.8 h1
  text "o" at -69.146,17.354 h1
  text "+" at 7.985,17.304 h1
  text "o" at -23.746,16.054 h1
  text "+" at -71.046,13.4 h1
  text "o" at 5.654,10.354 h1
  text "o" at 22.154,10.354 h1
  text "o" at -2.846,10.254 h1
  text "o" at 13.854,10.254 h1
  text "+" at 26.754,9.3 h1
  text "+" at -83.446,7.1 h1
  text "+" at -71.646,5 h1
  text "o" at -66.846,-6.446 h1
  text "+" at -40.015,-6.496 h1
  text "+" at -78.215,-6.996 h1
Drill Drawing:
  text "+3.3V_D" at 51.4,70.4 h1 r90